# EAGLE board AVR-Pocket-Programmer_Panel_v11a (EAGLE 7.5.0), part 1 of 3
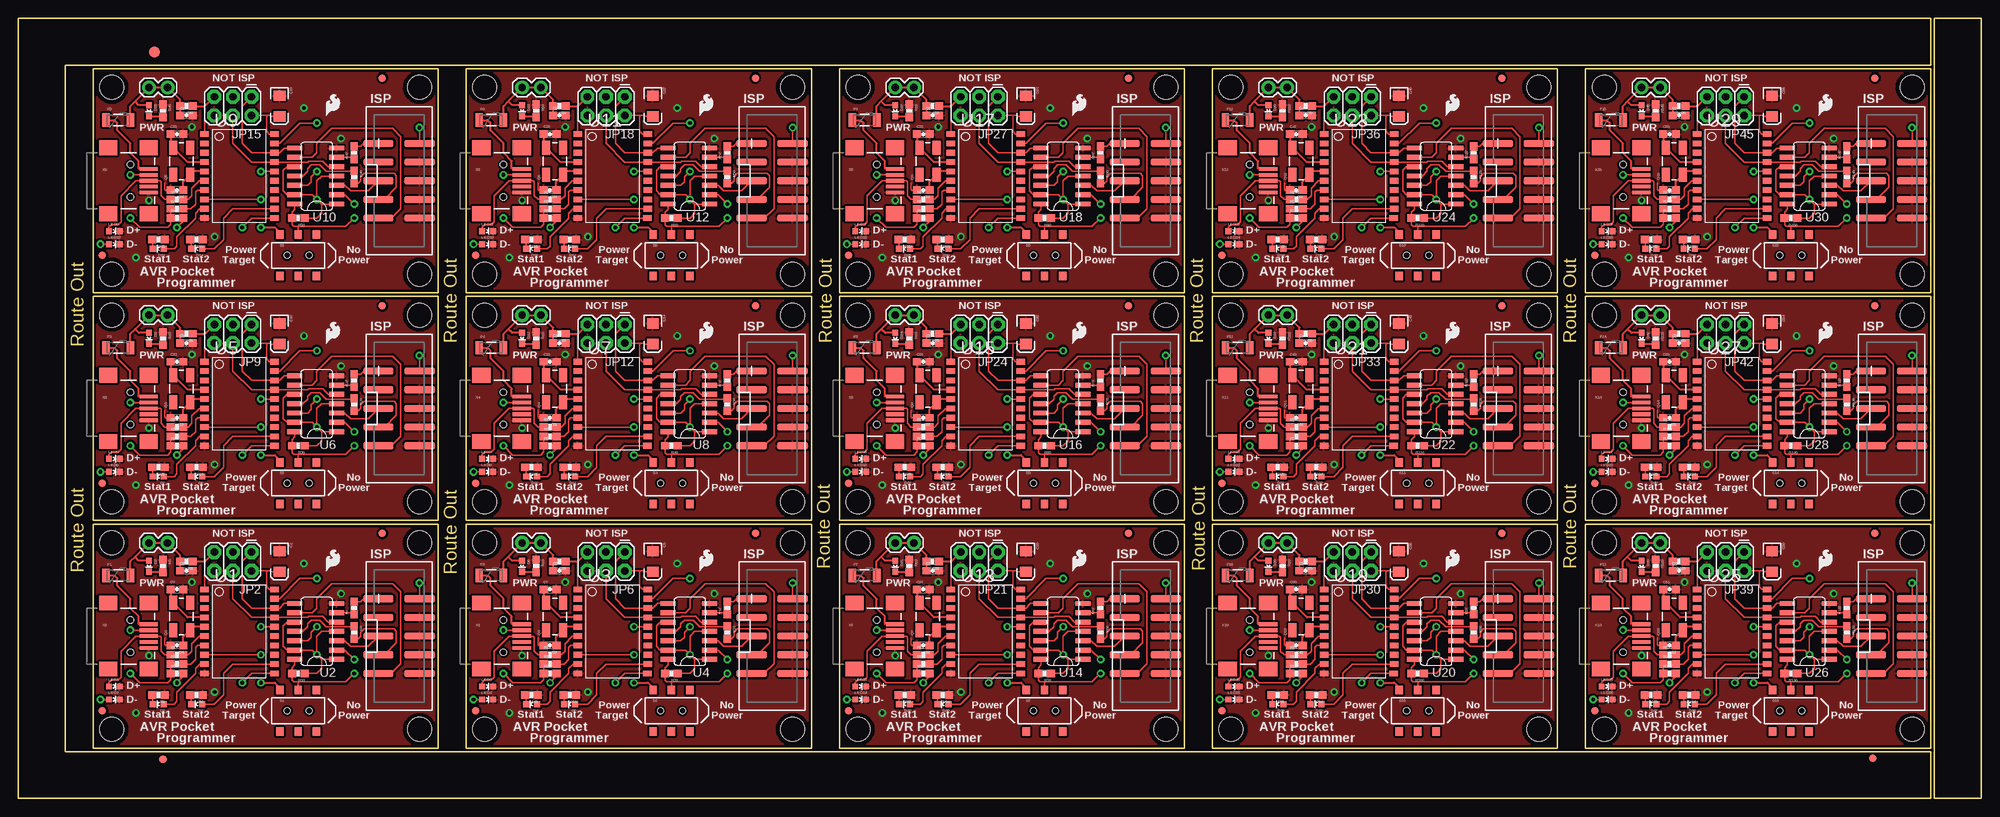
[diagram p0: board, top side]
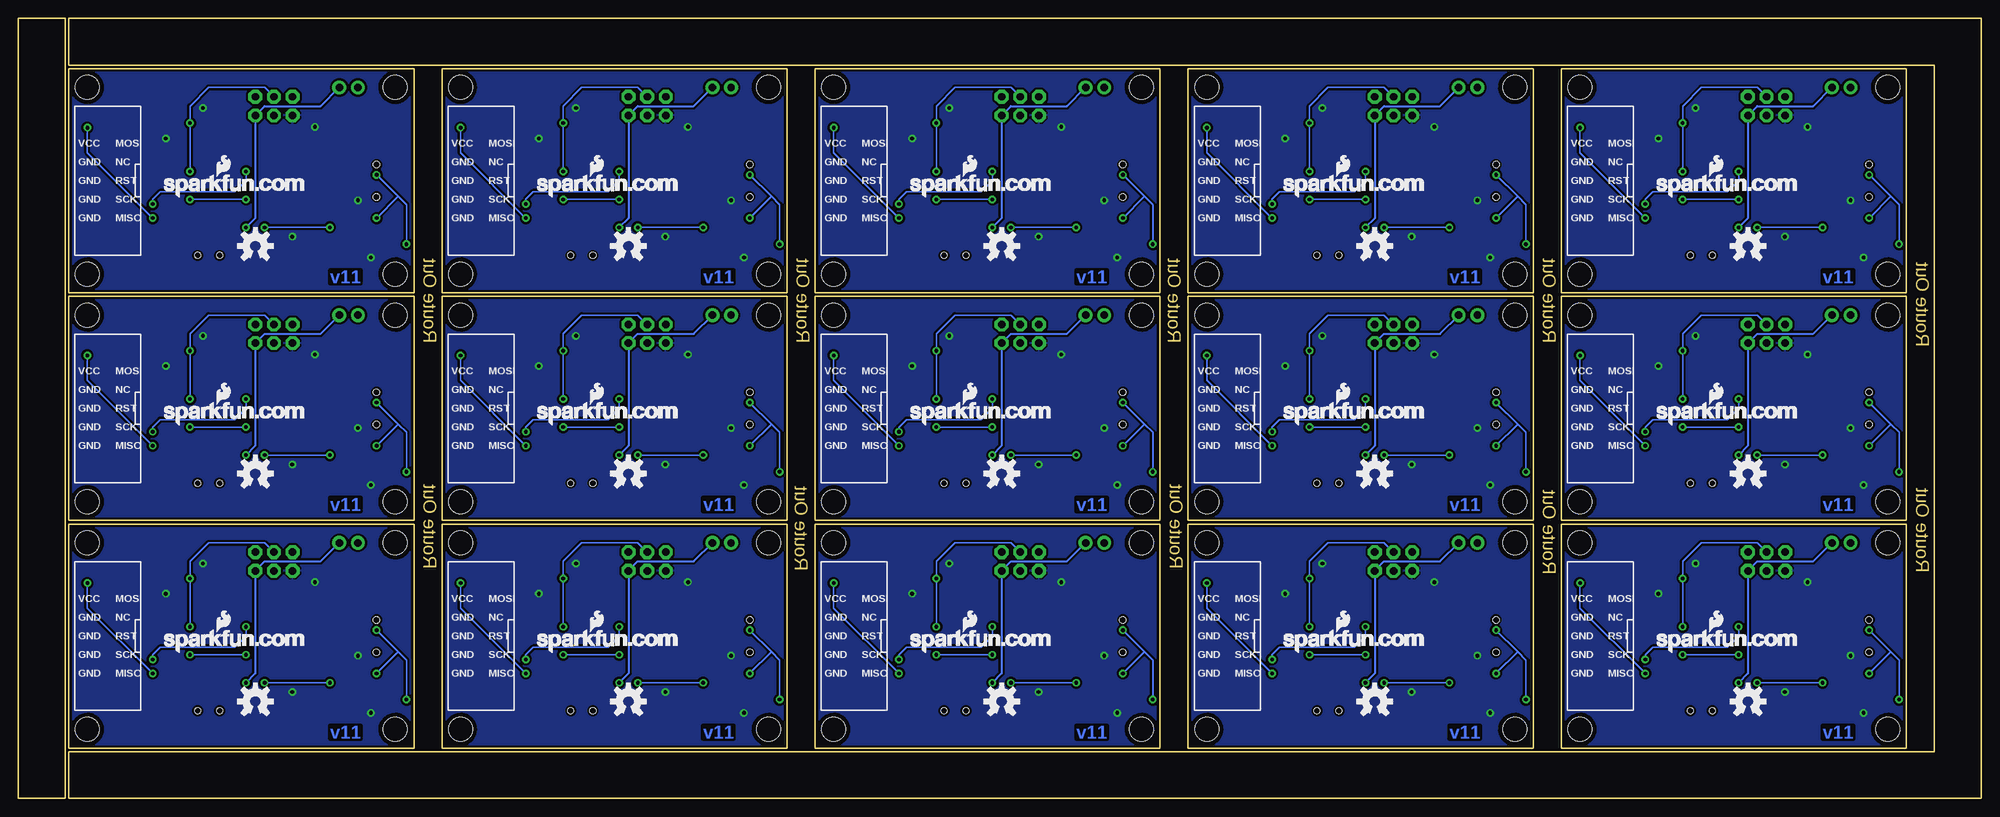
[diagram p1: board, bottom side, seen from below]

Size 267.21 x 106.17 mm. Coordinates in mm from the lower left corner, seen from the top.
Outline: 6.35,79.25 6.35,6.35 260.35,6.35 260.35,0 0,0 0,29.72
Outline: 0,27.18 0,106.17 6.35,106.17 187.96,106.17 190.5,106.17 260.35,106.17 260.35,99.82 6.35,99.82 6.35,76.71
Outline: 267.21,79.25 267.21,0 260.86,0 260.86,29.72
Outline: 260.86,27.18 260.86,106.17 267.21,106.17 267.21,76.71
Outline: 10.16,37.34 57.15,37.34 57.15,6.86 10.16,6.86 10.16,37.34
Outline: 60.96,37.34 107.95,37.34 107.95,6.86 60.96,6.86 60.96,37.34
Outline: 10.16,68.33 57.15,68.33 57.15,37.85 10.16,37.85 10.16,68.33
Outline: 60.96,68.33 107.95,68.33 107.95,37.85 60.96,37.85 60.96,68.33
Outline: 10.16,99.31 57.15,99.31 57.15,68.83 10.16,68.83 10.16,99.31
Outline: 60.96,99.31 107.95,99.31 107.95,68.83 60.96,68.83 60.96,99.31
Outline: 111.76,37.34 158.75,37.34 158.75,6.86 111.76,6.86 111.76,37.34
Outline: 111.76,68.33 158.75,68.33 158.75,37.85 111.76,37.85 111.76,68.33
Outline: 111.76,99.31 158.75,99.31 158.75,68.83 111.76,68.83 111.76,99.31
Outline: 162.56,37.34 209.55,37.34 209.55,6.86 162.56,6.86 162.56,37.34
Outline: 162.56,68.33 209.55,68.33 209.55,37.85 162.56,37.85 162.56,68.33
Outline: 162.56,99.31 209.55,99.31 209.55,68.83 162.56,68.83 162.56,99.31
Outline: 213.36,37.34 260.35,37.34 260.35,6.86 213.36,6.86 213.36,37.34
Outline: 213.36,68.33 260.35,68.33 260.35,37.85 213.36,37.85 213.36,68.33
Outline: 213.36,99.31 260.35,99.31 260.35,68.83 213.36,68.83 213.36,99.31
Copper layers (1*16): Top 0.035mm / dielectric 1.5mm / Bottom 0.035mm
Design rules "SparkFun": minimum track width 8mil, minimum drill 20mil, track to track 8mil, track to pad 8mil, pad to pad 8mil, via to via 8mil, smd to smd 8mil, copper to edge 10mil, drill to drill 8mil, minimum pad ring 12mil, minimum via ring 10mil, stop-mask expansion 4mil, vias tented up to drill 20mil, thermal gap 10mil
Net classes: 0 default: width 0.203 mm, drill 0.508 mm, clearance 0.203 mm

## Footprints (pad centres in the part's own frame; a part is rotated, then mirrored left to right if it is on the bottom)
EIA3216 = smd 1.4 x 1.6: A 1.4,0; C -1.4,0
0603-CAP = smd 1.1 x 1: 1 -0.85,0; 2 0.85,0
LED-0603 = smd 0.8 x 0.8: A 0,-0.75; C 0,0.75
FIDUCIAL-1.5X3 = smd 1.5 x 1.5: 1 0,0
FIDUCIAL-1X2 = smd 1 x 1: 1 0,0
PTC-1206-WIDE = smd 1 x 1.8: 1 -1.654,0; 2 1.654,0
1X02 = drill 1.016 pad 1.88: 1 0,0; 2 2.54,0
2X3 = drill 1.016 pad 1.88 octagon: 1 0,0; 2 0,2.54; 3 2.54,0; 4 2.54,2.54; 5 5.08,0; 6 5.08,2.54
2X5-SHROUDED_SMD = smd 4.15 x 1: 1 -2.794,5.08; 2 2.794,5.08; 3 -2.794,2.54; 4 2.794,2.54; 5 -2.794,0; 6 2.794,0; 7 -2.794,-2.54; 8 2.794,-2.54; 9 -2.794,-5.08; 10 2.794,-5.08
CRYSTAL-SMD-5X3 = smd 1.9 x 1.1: 1 -1.85,-1.15; 2 1.85,-1.15; 3 1.85,1.15; 4 -1.85,1.15
0603-RES = smd 1.1 x 1: 1 -0.85,0; 2 0.85,0
AYZ0202 = smd 1 x 1.15: 1 -2.5,2.825; 2 0,2.825; 3 2.5,2.825; 4 -2.5,-2.825; 5 0,-2.825; 6 2.5,-2.825 | hole 0.85: 1.5,0; -1.5,0
SO20L = smd 0.762 x 1.143: 1 -5.08,-5.131; 2 -3.81,-5.131; 3 -2.54,-5.131; 4 -1.27,-5.131; 5 0,-5.131; 6 1.27,-5.131; 7 2.54,-5.131; 8 3.81,-5.131; 9 5.08,-5.131; 10 6.35,-5.131; 11 6.35,4.369; 12 5.08,4.394; 13 3.81,4.394; 14 2.54,4.394; 15 1.27,4.394; 16 0,4.394; 17 -1.27,4.394; 18 -2.54,4.394; 19 -3.81,4.394; 20 -5.08,4.394
SO014 = smd 0.66 x 2.032: 1 -3.175,-2.68; 2 -1.905,-2.68; 3 -0.635,-2.68; 4 0.635,-2.68; 5 1.905,-2.68; 6 3.175,-2.68; 7 4.445,-2.68; 8 4.445,2.997; 9 3.175,2.997; 10 1.905,2.997; 11 0.635,2.997; 12 -0.635,2.997; 13 -1.905,2.997; 14 -3.175,2.997
STAND-OFF = hole 3.302: 0,0
USB-MINIB = smd 2.5 x 0.5: D+ 2.5,0; D- 2.5,0.8; GND 2.5,-1.6; ID 2.5,-0.8; VBUS 2.5,1.6 | smd 2.5 x 2: GND@1 -3,-4.5; GND@2 -3,4.5; GND@3 2.5,4.5; GND@4 2.5,-4.5 | hole 0.9: 0,2.2; 0,-2.2

## Placement (x,y rotation side)
C1  10uF  [EIA3216]  35.56,32.26 270 top
C2  0.1uF  [0603-CAP]  22.86,30.99 0 top
C3  22pF  [0603-CAP]  21.59,28.45 0 top
C4  22pF  [0603-CAP]  21.59,20.83 180 top
C5  0.1uF  [0603-CAP]  73.66,30.99 0 top
C6  10uF  [EIA3216]  86.36,32.26 270 top
C7  22pF  [0603-CAP]  72.39,28.45 0 top
C8  22pF  [0603-CAP]  72.39,20.83 180 top
C9  0.1uF  [0603-CAP]  22.86,61.98 0 top
C10  10uF  [EIA3216]  35.56,63.25 270 top
C11  22pF  [0603-CAP]  21.59,59.44 0 top
C12  22pF  [0603-CAP]  21.59,51.82 180 top
C13  0.1uF  [0603-CAP]  73.66,61.98 0 top
C14  10uF  [EIA3216]  86.36,63.25 270 top
C15  22pF  [0603-CAP]  72.39,59.44 0 top
C16  22pF  [0603-CAP]  72.39,51.82 180 top
C17  0.1uF  [0603-CAP]  22.86,92.96 0 top
C18  10uF  [EIA3216]  35.56,94.23 270 top
C19  22pF  [0603-CAP]  21.59,90.42 0 top
C20  22pF  [0603-CAP]  21.59,82.8 180 top
C21  0.1uF  [0603-CAP]  73.66,92.96 0 top
C22  10uF  [EIA3216]  86.36,94.23 270 top
C23  22pF  [0603-CAP]  72.39,90.42 0 top
C24  22pF  [0603-CAP]  72.39,82.8 180 top
C25  0.1uF  [0603-CAP]  124.46,30.99 0 top
C26  10uF  [EIA3216]  137.16,32.26 270 top
C27  22pF  [0603-CAP]  123.19,28.45 0 top
C28  22pF  [0603-CAP]  123.19,20.83 180 top
C29  0.1uF  [0603-CAP]  124.46,61.98 0 top
C30  10uF  [EIA3216]  137.16,63.25 270 top
C31  22pF  [0603-CAP]  123.19,59.44 0 top
C32  22pF  [0603-CAP]  123.19,51.82 180 top
C33  0.1uF  [0603-CAP]  124.46,92.96 0 top
C34  10uF  [EIA3216]  137.16,94.23 270 top
C35  22pF  [0603-CAP]  123.19,90.42 0 top
C36  22pF  [0603-CAP]  123.19,82.8 180 top
C37  0.1uF  [0603-CAP]  175.26,30.99 0 top
C38  10uF  [EIA3216]  187.96,32.26 270 top
C39  22pF  [0603-CAP]  173.99,28.45 0 top
C40  22pF  [0603-CAP]  173.99,20.83 180 top
C41  0.1uF  [0603-CAP]  175.26,61.98 0 top
C42  10uF  [EIA3216]  187.96,63.25 270 top
C43  22pF  [0603-CAP]  173.99,59.44 0 top
C44  22pF  [0603-CAP]  173.99,51.82 180 top
C45  0.1uF  [0603-CAP]  175.26,92.96 0 top
C46  10uF  [EIA3216]  187.96,94.23 270 top
C47  22pF  [0603-CAP]  173.99,90.42 0 top
C48  22pF  [0603-CAP]  173.99,82.8 180 top
C49  0.1uF  [0603-CAP]  226.06,30.99 0 top
C50  10uF  [EIA3216]  238.76,32.26 270 top
C51  22pF  [0603-CAP]  224.79,28.45 0 top
C52  22pF  [0603-CAP]  224.79,20.83 180 top
C53  0.1uF  [0603-CAP]  226.06,61.98 0 top
C54  10uF  [EIA3216]  238.76,63.25 270 top
C55  22pF  [0603-CAP]  224.79,59.44 0 top
C56  22pF  [0603-CAP]  224.79,51.82 180 top
C57  0.1uF  [0603-CAP]  226.06,92.96 0 top
C58  10uF  [EIA3216]  238.76,94.23 270 top
C59  22pF  [0603-CAP]  224.79,90.42 0 top
C60  22pF  [0603-CAP]  224.79,82.8 180 top
D1  Blue  [LED-0603]  24.26,12.83 90 top
D2  Red  [LED-0603]  19.05,12.83 90 top
D3  Blue  [LED-0603]  17.78,31.62 180 top
D4  Red  [LED-0603]  69.85,12.83 90 top
D5  Blue  [LED-0603]  75.06,12.83 90 top
D6  Blue  [LED-0603]  68.58,31.62 180 top
D7  Red  [LED-0603]  19.05,43.81 90 top
D8  Blue  [LED-0603]  24.26,43.81 90 top
D9  Blue  [LED-0603]  17.78,62.61 180 top
D10  Red  [LED-0603]  69.85,43.81 90 top
D11  Blue  [LED-0603]  75.06,43.81 90 top
D12  Blue  [LED-0603]  68.58,62.61 180 top
D13  Red  [LED-0603]  19.05,74.8 90 top
D14  Blue  [LED-0603]  24.26,74.8 90 top
D15  Blue  [LED-0603]  17.78,93.6 180 top
D16  Red  [LED-0603]  69.85,74.8 90 top
D17  Blue  [LED-0603]  75.06,74.8 90 top
D18  Blue  [LED-0603]  68.58,93.6 180 top
D19  Red  [LED-0603]  120.65,12.83 90 top
D20  Blue  [LED-0603]  125.86,12.83 90 top
D21  Blue  [LED-0603]  119.38,31.62 180 top
D22  Red  [LED-0603]  120.65,43.81 90 top
D23  Blue  [LED-0603]  125.86,43.81 90 top
D24  Blue  [LED-0603]  119.38,62.61 180 top
D25  Red  [LED-0603]  120.65,74.8 90 top
D26  Blue  [LED-0603]  125.86,74.8 90 top
D27  Blue  [LED-0603]  119.38,93.6 180 top
D28  Red  [LED-0603]  171.45,12.83 90 top
D29  Blue  [LED-0603]  176.66,12.83 90 top
D30  Blue  [LED-0603]  170.18,31.62 180 top
D31  Red  [LED-0603]  171.45,43.81 90 top
D32  Blue  [LED-0603]  176.66,43.81 90 top
D33  Blue  [LED-0603]  170.18,62.61 180 top
D34  Red  [LED-0603]  171.45,74.8 90 top
D35  Blue  [LED-0603]  176.66,74.8 90 top
D36  Blue  [LED-0603]  170.18,93.6 180 top
D37  Red  [LED-0603]  222.25,12.83 90 top
D38  Blue  [LED-0603]  227.46,12.83 90 top
D39  Blue  [LED-0603]  220.98,31.62 180 top
D40  Red  [LED-0603]  222.25,43.81 90 top
D41  Blue  [LED-0603]  227.46,43.81 90 top
D42  Blue  [LED-0603]  220.98,62.61 180 top
D43  Red  [LED-0603]  222.25,74.8 90 top
D44  Blue  [LED-0603]  227.46,74.8 90 top
D45  Blue  [LED-0603]  220.98,93.6 180 top
E$1  [FIDUCIAL-1.5X3]  18.54,101.6 0 top
E$2  [FIDUCIAL-1X2]  19.68,5.33 180 top
E$7  [FIDUCIAL-1X2]  252.48,5.46 90 top
F1  500mA  [PTC-1206-WIDE]  13.59,30.35 0 top
F2  500mA  [PTC-1206-WIDE]  64.39,30.35 0 top
F3  500mA  [PTC-1206-WIDE]  13.59,61.34 0 top
F4  500mA  [PTC-1206-WIDE]  64.39,61.34 0 top
F5  500mA  [PTC-1206-WIDE]  13.59,92.33 0 top
F6  500mA  [PTC-1206-WIDE]  64.39,92.33 0 top
F7  500mA  [PTC-1206-WIDE]  115.19,30.35 0 top
F8  500mA  [PTC-1206-WIDE]  115.19,61.34 0 top
F9  500mA  [PTC-1206-WIDE]  115.19,92.33 0 top
F10  500mA  [PTC-1206-WIDE]  165.99,30.35 0 top
F11  500mA  [PTC-1206-WIDE]  165.99,61.34 0 top
F12  500mA  [PTC-1206-WIDE]  165.99,92.33 0 top
F13  500mA  [PTC-1206-WIDE]  216.79,30.35 0 top
F14  500mA  [PTC-1206-WIDE]  216.79,61.34 0 top
F15  500mA  [PTC-1206-WIDE]  216.79,92.33 0 top
JP1  Power Select  [1X02]  17.78,34.8 0 top
JP2  AVR_SPI_PRG_6PTH  [2X3]  31.75,33.53 180 top
JP3  AVR_SPI_PROG2SHROUDED_SMD  [2X5-SHROUDED_SMD]  51.82,22.1 0 top
JP4  Power Select  [1X02]  68.58,34.8 0 top
JP5  AVR_SPI_PROG2SHROUDED_SMD  [2X5-SHROUDED_SMD]  102.62,22.1 0 top
JP6  AVR_SPI_PRG_6PTH  [2X3]  82.55,33.53 180 top
JP7  Power Select  [1X02]  17.78,65.79 0 top
JP8  AVR_SPI_PROG2SHROUDED_SMD  [2X5-SHROUDED_SMD]  51.82,53.09 0 top
JP9  AVR_SPI_PRG_6PTH  [2X3]  31.75,64.52 180 top
JP10  Power Select  [1X02]  68.58,65.79 0 top
JP11  AVR_SPI_PROG2SHROUDED_SMD  [2X5-SHROUDED_SMD]  102.62,53.09 0 top
JP12  AVR_SPI_PRG_6PTH  [2X3]  82.55,64.52 180 top
JP13  Power Select  [1X02]  17.78,96.77 0 top
JP14  AVR_SPI_PROG2SHROUDED_SMD  [2X5-SHROUDED_SMD]  51.82,84.07 0 top
JP15  AVR_SPI_PRG_6PTH  [2X3]  31.75,95.5 180 top
JP16  Power Select  [1X02]  68.58,96.77 0 top
JP17  AVR_SPI_PROG2SHROUDED_SMD  [2X5-SHROUDED_SMD]  102.62,84.07 0 top
JP18  AVR_SPI_PRG_6PTH  [2X3]  82.55,95.5 180 top
JP19  Power Select  [1X02]  119.38,34.8 0 top
JP20  AVR_SPI_PROG2SHROUDED_SMD  [2X5-SHROUDED_SMD]  153.42,22.1 0 top
JP21  AVR_SPI_PRG_6PTH  [2X3]  133.35,33.53 180 top
JP22  Power Select  [1X02]  119.38,65.79 0 top
JP23  AVR_SPI_PROG2SHROUDED_SMD  [2X5-SHROUDED_SMD]  153.42,53.09 0 top
JP24  AVR_SPI_PRG_6PTH  [2X3]  133.35,64.52 180 top
JP25  Power Select  [1X02]  119.38,96.77 0 top
JP26  AVR_SPI_PROG2SHROUDED_SMD  [2X5-SHROUDED_SMD]  153.42,84.07 0 top
JP27  AVR_SPI_PRG_6PTH  [2X3]  133.35,95.5 180 top
JP28  Power Select  [1X02]  170.18,34.8 0 top
JP29  AVR_SPI_PROG2SHROUDED_SMD  [2X5-SHROUDED_SMD]  204.22,22.1 0 top
JP30  AVR_SPI_PRG_6PTH  [2X3]  184.15,33.53 180 top
JP31  Power Select  [1X02]  170.18,65.79 0 top
JP32  AVR_SPI_PROG2SHROUDED_SMD  [2X5-SHROUDED_SMD]  204.22,53.09 0 top
JP33  AVR_SPI_PRG_6PTH  [2X3]  184.15,64.52 180 top
JP34  Power Select  [1X02]  170.18,96.77 0 top
JP35  AVR_SPI_PROG2SHROUDED_SMD  [2X5-SHROUDED_SMD]  204.22,84.07 0 top
JP36  AVR_SPI_PRG_6PTH  [2X3]  184.15,95.5 180 top
JP37  Power Select  [1X02]  220.98,34.8 0 top
JP38  AVR_SPI_PROG2SHROUDED_SMD  [2X5-SHROUDED_SMD]  255.02,22.1 0 top
JP39  AVR_SPI_PRG_6PTH  [2X3]  234.95,33.53 180 top
JP40  Power Select  [1X02]  220.98,65.79 0 top
JP41  AVR_SPI_PROG2SHROUDED_SMD  [2X5-SHROUDED_SMD]  255.02,53.09 0 top
JP42  AVR_SPI_PRG_6PTH  [2X3]  234.95,64.52 180 top
JP43  Power Select  [1X02]  220.98,96.77 0 top
JP44  AVR_SPI_PROG2SHROUDED_SMD  [2X5-SHROUDED_SMD]  255.02,84.07 0 top
JP45  AVR_SPI_PRG_6PTH  [2X3]  234.95,95.5 180 top
LED1  Blue  [LED-0603]  13.08,15.24 270 top
LED2  Blue  [LED-0603]  13.08,13.46 270 top
LED3  Blue  [LED-0603]  63.88,15.24 270 top
LED4  Blue  [LED-0603]  63.88,13.46 270 top
LED5  Blue  [LED-0603]  13.08,46.23 270 top
LED6  Blue  [LED-0603]  13.08,44.45 270 top
LED7  Blue  [LED-0603]  63.88,46.23 270 top
LED8  Blue  [LED-0603]  63.88,44.45 270 top
LED9  Blue  [LED-0603]  13.08,77.22 270 top
LED10  Blue  [LED-0603]  13.08,75.44 270 top
LED11  Blue  [LED-0603]  63.88,77.22 270 top
LED12  Blue  [LED-0603]  63.88,75.44 270 top
LED13  Blue  [LED-0603]  114.68,15.24 270 top
LED14  Blue  [LED-0603]  114.68,13.46 270 top
LED15  Blue  [LED-0603]  114.68,46.23 270 top
LED16  Blue  [LED-0603]  114.68,44.45 270 top
LED17  Blue  [LED-0603]  114.68,77.22 270 top
LED18  Blue  [LED-0603]  114.68,75.44 270 top
LED19  Blue  [LED-0603]  165.48,15.24 270 top
LED20  Blue  [LED-0603]  165.48,13.46 270 top
LED21  Blue  [LED-0603]  165.48,46.23 270 top
LED22  Blue  [LED-0603]  165.48,44.45 270 top
LED23  Blue  [LED-0603]  165.48,77.22 270 top
LED24  Blue  [LED-0603]  165.48,75.44 270 top
LED25  Blue  [LED-0603]  216.28,15.24 270 top
LED26  Blue  [LED-0603]  216.28,13.46 270 top
LED27  Blue  [LED-0603]  216.28,46.23 270 top
LED28  Blue  [LED-0603]  216.28,44.45 270 top
LED29  Blue  [LED-0603]  216.28,77.22 270 top
LED30  Blue  [LED-0603]  216.28,75.44 270 top
LOGO1  OSHW-LOGOM  [OSHW-LOGO-M]  31.75,13.21 0 bottom
LOGO2  OSHW-LOGOM  [OSHW-LOGO-M]  82.55,13.21 0 bottom
LOGO3  OSHW-LOGOM  [OSHW-LOGO-M]  31.75,44.2 0 bottom
LOGO4  OSHW-LOGOM  [OSHW-LOGO-M]  82.55,44.2 0 bottom
LOGO5  OSHW-LOGOM  [OSHW-LOGO-M]  31.75,75.18 0 bottom
LOGO6  OSHW-LOGOM  [OSHW-LOGO-M]  82.55,75.18 0 bottom
LOGO7  OSHW-LOGOM  [OSHW-LOGO-M]  133.35,13.21 0 bottom
LOGO8  OSHW-LOGOM  [OSHW-LOGO-M]  133.35,44.2 0 bottom
LOGO9  OSHW-LOGOM  [OSHW-LOGO-M]  133.35,75.18 0 bottom
LOGO10  OSHW-LOGOM  [OSHW-LOGO-M]  184.15,13.21 0 bottom
LOGO11  OSHW-LOGOM  [OSHW-LOGO-M]  184.15,44.2 0 bottom
LOGO12  OSHW-LOGOM  [OSHW-LOGO-M]  184.15,75.18 0 bottom
LOGO13  OSHW-LOGOM  [OSHW-LOGO-M]  234.95,13.21 0 bottom
LOGO14  OSHW-LOGOM  [OSHW-LOGO-M]  234.95,44.2 0 bottom
LOGO15  OSHW-LOGOM  [OSHW-LOGO-M]  234.95,75.18 0 bottom
Q1  12 MHz  [CRYSTAL-SMD-5X3]  22.23,24.77 90 top
Q2  12 MHz  [CRYSTAL-SMD-5X3]  73.03,24.77 90 top
Q3  12 MHz  [CRYSTAL-SMD-5X3]  22.23,55.75 90 top
Q4  12 MHz  [CRYSTAL-SMD-5X3]  73.03,55.75 90 top
Q5  12 MHz  [CRYSTAL-SMD-5X3]  22.23,86.74 90 top
Q6  12 MHz  [CRYSTAL-SMD-5X3]  73.03,86.74 90 top
Q7  12 MHz  [CRYSTAL-SMD-5X3]  123.83,24.77 90 top
Q8  12 MHz  [CRYSTAL-SMD-5X3]  123.83,55.75 90 top
Q9  12 MHz  [CRYSTAL-SMD-5X3]  123.83,86.74 90 top
Q10  12 MHz  [CRYSTAL-SMD-5X3]  174.62,24.77 90 top
Q11  12 MHz  [CRYSTAL-SMD-5X3]  174.62,55.75 90 top
Q12  12 MHz  [CRYSTAL-SMD-5X3]  174.62,86.74 90 top
Q13  12 MHz  [CRYSTAL-SMD-5X3]  225.43,24.77 90 top
Q14  12 MHz  [CRYSTAL-SMD-5X3]  225.43,55.75 90 top
Q15  12 MHz  [CRYSTAL-SMD-5X3]  225.43,86.74 90 top
R1  27  [0603-RES]  21.59,19.56 0 top
R2  27  [0603-RES]  21.59,18.29 0 top
R3  1.5K  [0603-RES]  21.59,17.02 0 top
R4  1K  [0603-RES]  24.26,14.1 180 top
R5  1K  [0603-RES]  19.05,14.1 180 top
R6  1K  [0603-RES]  22.86,32.26 180 top
R7  100  [0603-RES]  45.72,25.91 90 top
R8  100  [0603-RES]  45.72,22.61 270 top
R9  1K  [0603-RES]  19.68,31.62 270 top
R10  22K  [0603-RES]  38.1,17.02 180 top
R11  27  [0603-RES]  72.39,19.56 0 top
R12  27  [0603-RES]  72.39,18.29 0 top
R13  1.5K  [0603-RES]  72.39,17.02 0 top
R14  1K  [0603-RES]  75.06,14.1 180 top
R15  1K  [0603-RES]  69.85,14.1 180 top
R16  1K  [0603-RES]  73.66,32.26 180 top
R17  100  [0603-RES]  96.52,25.91 90 top
R18  100  [0603-RES]  96.52,22.61 270 top
R19  1K  [0603-RES]  70.48,31.62 270 top
R20  22K  [0603-RES]  88.9,17.02 180 top
R21  27  [0603-RES]  21.59,50.55 0 top
R22  27  [0603-RES]  21.59,49.28 0 top
R23  1.5K  [0603-RES]  21.59,48.01 0 top
R24  1K  [0603-RES]  24.26,45.09 180 top
R25  1K  [0603-RES]  19.05,45.09 180 top
R26  1K  [0603-RES]  22.86,63.25 180 top
R27  100  [0603-RES]  45.72,56.9 90 top
R28  100  [0603-RES]  45.72,53.59 270 top
R29  1K  [0603-RES]  19.68,62.61 270 top
R30  22K  [0603-RES]  38.1,48.01 180 top
R31  27  [0603-RES]  72.39,50.55 0 top
R32  27  [0603-RES]  72.39,49.28 0 top
R33  1.5K  [0603-RES]  72.39,48.01 0 top
R34  1K  [0603-RES]  75.06,45.09 180 top
R35  1K  [0603-RES]  69.85,45.09 180 top
R36  1K  [0603-RES]  73.66,63.25 180 top
R37  100  [0603-RES]  96.52,56.9 90 top
R38  100  [0603-RES]  96.52,53.59 270 top
R39  1K  [0603-RES]  70.48,62.61 270 top
R40  22K  [0603-RES]  88.9,48.01 180 top
R41  27  [0603-RES]  21.59,81.53 0 top
R42  27  [0603-RES]  21.59,80.26 0 top
R43  1.5K  [0603-RES]  21.59,78.99 0 top
R44  1K  [0603-RES]  24.26,76.07 180 top
R45  1K  [0603-RES]  19.05,76.07 180 top
R46  1K  [0603-RES]  22.86,94.23 180 top
R47  100  [0603-RES]  45.72,87.88 90 top
R48  100  [0603-RES]  45.72,84.58 270 top
R49  1K  [0603-RES]  19.68,93.6 270 top
R50  22K  [0603-RES]  38.1,78.99 180 top
R51  27  [0603-RES]  72.39,81.53 0 top
R52  27  [0603-RES]  72.39,80.26 0 top
R53  1.5K  [0603-RES]  72.39,78.99 0 top
R54  1K  [0603-RES]  75.06,76.07 180 top
R55  1K  [0603-RES]  69.85,76.07 180 top
R56  1K  [0603-RES]  73.66,94.23 180 top
R57  100  [0603-RES]  96.52,87.88 90 top
R58  100  [0603-RES]  96.52,84.58 270 top
R59  1K  [0603-RES]  70.48,93.6 270 top
R60  22K  [0603-RES]  88.9,78.99 180 top
R61  27  [0603-RES]  123.19,19.56 0 top
R62  27  [0603-RES]  123.19,18.29 0 top
R63  1.5K  [0603-RES]  123.19,17.02 0 top
R64  1K  [0603-RES]  125.86,14.1 180 top
R65  1K  [0603-RES]  120.65,14.1 180 top
R66  1K  [0603-RES]  124.46,32.26 180 top
R67  100  [0603-RES]  147.32,25.91 90 top
R68  100  [0603-RES]  147.32,22.61 270 top
R69  1K  [0603-RES]  121.28,31.62 270 top
R70  22K  [0603-RES]  139.7,17.02 180 top
R71  27  [0603-RES]  123.19,50.55 0 top
R72  27  [0603-RES]  123.19,49.28 0 top
R73  1.5K  [0603-RES]  123.19,48.01 0 top
R74  1K  [0603-RES]  125.86,45.09 180 top
R75  1K  [0603-RES]  120.65,45.09 180 top
R76  1K  [0603-RES]  124.46,63.25 180 top
R77  100  [0603-RES]  147.32,56.9 90 top
R78  100  [0603-RES]  147.32,53.59 270 top
R79  1K  [0603-RES]  121.28,62.61 270 top
R80  22K  [0603-RES]  139.7,48.01 180 top
R81  27  [0603-RES]  123.19,81.53 0 top
R82  27  [0603-RES]  123.19,80.26 0 top
R83  1.5K  [0603-RES]  123.19,78.99 0 top
R84  1K  [0603-RES]  125.86,76.07 180 top
R85  1K  [0603-RES]  120.65,76.07 180 top
R86  1K  [0603-RES]  124.46,94.23 180 top
R87  100  [0603-RES]  147.32,87.88 90 top
R88  100  [0603-RES]  147.32,84.58 270 top
R89  1K  [0603-RES]  121.28,93.6 270 top
R90  22K  [0603-RES]  139.7,78.99 180 top
R91  27  [0603-RES]  173.99,19.56 0 top
R92  27  [0603-RES]  173.99,18.29 0 top
R93  1.5K  [0603-RES]  173.99,17.02 0 top
R94  1K  [0603-RES]  176.66,14.1 180 top
R95  1K  [0603-RES]  171.45,14.1 180 top
R96  1K  [0603-RES]  175.26,32.26 180 top
R97  100  [0603-RES]  198.12,25.91 90 top
R98  100  [0603-RES]  198.12,22.61 270 top
R99  1K  [0603-RES]  172.09,31.62 270 top
R100  22K  [0603-RES]  190.5,17.02 180 top
R101  27  [0603-RES]  173.99,50.55 0 top
R102  27  [0603-RES]  173.99,49.28 0 top
R103  1.5K  [0603-RES]  173.99,48.01 0 top
R104  1K  [0603-RES]  176.66,45.09 180 top
R105  1K  [0603-RES]  171.45,45.09 180 top
R106  1K  [0603-RES]  175.26,63.25 180 top
R107  100  [0603-RES]  198.12,56.9 90 top
R108  100  [0603-RES]  198.12,53.59 270 top
R109  1K  [0603-RES]  172.09,62.61 270 top
R110  22K  [0603-RES]  190.5,48.01 180 top
R111  27  [0603-RES]  173.99,81.53 0 top
R112  27  [0603-RES]  173.99,80.26 0 top
R113  1.5K  [0603-RES]  173.99,78.99 0 top
R114  1K  [0603-RES]  176.66,76.07 180 top
R115  1K  [0603-RES]  171.45,76.07 180 top
R116  1K  [0603-RES]  175.26,94.23 180 top
R117  100  [0603-RES]  198.12,87.88 90 top
R118  100  [0603-RES]  198.12,84.58 270 top
R119  1K  [0603-RES]  172.09,93.6 270 top
R120  22K  [0603-RES]  190.5,78.99 180 top
R121  27  [0603-RES]  224.79,19.56 0 top
R122  27  [0603-RES]  224.79,18.29 0 top
R123  1.5K  [0603-RES]  224.79,17.02 0 top
R124  1K  [0603-RES]  227.46,14.1 180 top
R125  1K  [0603-RES]  222.25,14.1 180 top
R126  1K  [0603-RES]  226.06,32.26 180 top
R127  100  [0603-RES]  248.92,25.91 90 top
R128  100  [0603-RES]  248.92,22.61 270 top
R129  1K  [0603-RES]  222.88,31.62 270 top
R130  22K  [0603-RES]  241.3,17.02 180 top
R131  27  [0603-RES]  224.79,50.55 0 top
R132  27  [0603-RES]  224.79,49.28 0 top
R133  1.5K  [0603-RES]  224.79,48.01 0 top
R134  1K  [0603-RES]  227.46,45.09 180 top
R135  1K  [0603-RES]  222.25,45.09 180 top
R136  1K  [0603-RES]  226.06,63.25 180 top
R137  100  [0603-RES]  248.92,56.9 90 top
R138  100  [0603-RES]  248.92,53.59 270 top
R139  1K  [0603-RES]  222.88,62.61 270 top
R140  22K  [0603-RES]  241.3,48.01 180 top
R141  27  [0603-RES]  224.79,81.53 0 top
R142  27  [0603-RES]  224.79,80.26 0 top
R143  1.5K  [0603-RES]  224.79,78.99 0 top
R144  1K  [0603-RES]  227.46,76.07 180 top
R145  1K  [0603-RES]  222.25,76.07 180 top
R146  1K  [0603-RES]  226.06,94.23 180 top
R147  100  [0603-RES]  248.92,87.88 90 top
R148  100  [0603-RES]  248.92,84.58 270 top
R149  1K  [0603-RES]  222.88,93.6 270 top
R150  22K  [0603-RES]  241.3,78.99 180 top
S1  Power Select  [AYZ0202]  38.1,11.94 0 top
S2  Power Select  [AYZ0202]  88.9,11.94 0 top
S3  Power Select  [AYZ0202]  38.1,42.93 0 top
S4  Power Select  [AYZ0202]  88.9,42.93 0 top
S5  Power Select  [AYZ0202]  38.1,73.91 0 top
S6  Power Select  [AYZ0202]  88.9,73.91 0 top
S7  Power Select  [AYZ0202]  139.7,11.94 0 top
S8  Power Select  [AYZ0202]  139.7,42.93 0 top
S9  Power Select  [AYZ0202]  139.7,73.91 0 top
S10  Power Select  [AYZ0202]  190.5,11.94 0 top
S11  Power Select  [AYZ0202]  190.5,42.93 0 top
S12  Power Select  [AYZ0202]  190.5,73.91 0 top
S13  Power Select  [AYZ0202]  241.3,11.94 0 top
S14  Power Select  [AYZ0202]  241.3,42.93 0 top
S15  Power Select  [AYZ0202]  241.3,73.91 0 top
U1  ATTINY2313-20S  [SO20L]  30.48,23.37 270 top
U2  74ACT125D  [SO014]  40.64,22.1 90 top
U3  ATTINY2313-20S  [SO20L]  81.28,23.37 270 top
U4  74ACT125D  [SO014]  91.44,22.1 90 top
U5  ATTINY2313-20S  [SO20L]  30.48,54.36 270 top
U6  74ACT125D  [SO014]  40.64,53.09 90 top
U7  ATTINY2313-20S  [SO20L]  81.28,54.36 270 top
U8  74ACT125D  [SO014]  91.44,53.09 90 top
U9  ATTINY2313-20S  [SO20L]  30.48,85.34 270 top
U10  74ACT125D  [SO014]  40.64,84.07 90 top
U11  ATTINY2313-20S  [SO20L]  81.28,85.34 270 top
U12  74ACT125D  [SO014]  91.44,84.07 90 top
U13  ATTINY2313-20S  [SO20L]  132.08,23.37 270 top
U14  74ACT125D  [SO014]  142.24,22.1 90 top
U15  ATTINY2313-20S  [SO20L]  132.08,54.36 270 top
U16  74ACT125D  [SO014]  142.24,53.09 90 top
U17  ATTINY2313-20S  [SO20L]  132.08,85.34 270 top
U18  74ACT125D  [SO014]  142.24,84.07 90 top
U19  ATTINY2313-20S  [SO20L]  182.88,23.37 270 top
U20  74ACT125D  [SO014]  193.04,22.1 90 top
U21  ATTINY2313-20S  [SO20L]  182.88,54.36 270 top
U22  74ACT125D  [SO014]  193.04,53.09 90 top
U23  ATTINY2313-20S  [SO20L]  182.88,85.34 270 top
U24  74ACT125D  [SO014]  193.04,84.07 90 top
U25  ATTINY2313-20S  [SO20L]  233.68,23.37 270 top
U26  74ACT125D  [SO014]  243.84,22.1 90 top
U27  ATTINY2313-20S  [SO20L]  233.68,54.36 270 top
U28  74ACT125D  [SO014]  243.84,53.09 90 top
U29  ATTINY2313-20S  [SO20L]  233.68,85.34 270 top
U30  74ACT125D  [SO014]  243.84,84.07 90 top
U$1  STAND-OFF  [STAND-OFF]  12.7,9.4 0 top
U$2  LOGO-SFESK  [SFE-LOGO-FLAME]  41.91,30.99 0 top
U$3  STAND-OFF  [STAND-OFF]  12.7,34.8 0 top
U$4  STAND-OFF  [STAND-OFF]  54.61,34.8 0 top
U$5  STAND-OFF  [STAND-OFF]  54.61,9.4 0 top
U$6  FIDUCIAL1X2  [FIDUCIAL-1X2]  11.43,11.94 0 top
U$7  FIDUCIAL1X2  [FIDUCIAL-1X2]  49.53,36.07 0 top
U$8  LOGO-SFENEW  [SFE-NEW-WEBLOGO]  44.2,19.81 0 bottom
U$9  STAND-OFF  [STAND-OFF]  63.5,9.4 0 top
U$10  STAND-OFF  [STAND-OFF]  63.5,34.8 0 top
U$11  STAND-OFF  [STAND-OFF]  105.41,34.8 0 top
U$12  STAND-OFF  [STAND-OFF]  105.41,9.4 0 top
U$13  FIDUCIAL1X2  [FIDUCIAL-1X2]  62.23,11.94 0 top
U$14  FIDUCIAL1X2  [FIDUCIAL-1X2]  100.33,36.07 0 top
U$15  LOGO-SFENEW  [SFE-NEW-WEBLOGO]  95,19.81 0 bottom
U$16  LOGO-SFESK  [SFE-LOGO-FLAME]  92.71,30.99 0 top
U$17  STAND-OFF  [STAND-OFF]  12.7,40.39 0 top
U$18  STAND-OFF  [STAND-OFF]  12.7,65.79 0 top
U$19  STAND-OFF  [STAND-OFF]  54.61,65.79 0 top
U$20  STAND-OFF  [STAND-OFF]  54.61,40.39 0 top
U$21  FIDUCIAL1X2  [FIDUCIAL-1X2]  11.43,42.93 0 top
U$22  FIDUCIAL1X2  [FIDUCIAL-1X2]  49.53,67.06 0 top
U$23  LOGO-SFENEW  [SFE-NEW-WEBLOGO]  44.2,50.8 0 bottom
U$24  LOGO-SFESK  [SFE-LOGO-FLAME]  41.91,61.98 0 top
U$25  STAND-OFF  [STAND-OFF]  63.5,40.39 0 top
U$26  STAND-OFF  [STAND-OFF]  63.5,65.79 0 top
U$27  STAND-OFF  [STAND-OFF]  105.41,65.79 0 top
U$28  STAND-OFF  [STAND-OFF]  105.41,40.39 0 top
U$29  FIDUCIAL1X2  [FIDUCIAL-1X2]  62.23,42.93 0 top
U$30  FIDUCIAL1X2  [FIDUCIAL-1X2]  100.33,67.06 0 top
U$31  LOGO-SFENEW  [SFE-NEW-WEBLOGO]  95,50.8 0 bottom
U$32  LOGO-SFESK  [SFE-LOGO-FLAME]  92.71,61.98 0 top
U$33  STAND-OFF  [STAND-OFF]  12.7,71.37 0 top
U$34  STAND-OFF  [STAND-OFF]  12.7,96.77 0 top
U$35  STAND-OFF  [STAND-OFF]  54.61,96.77 0 top
U$36  STAND-OFF  [STAND-OFF]  54.61,71.37 0 top
U$37  FIDUCIAL1X2  [FIDUCIAL-1X2]  11.43,73.91 0 top
U$38  FIDUCIAL1X2  [FIDUCIAL-1X2]  49.53,98.04 0 top
U$39  LOGO-SFENEW  [SFE-NEW-WEBLOGO]  44.2,81.79 0 bottom
U$40  LOGO-SFESK  [SFE-LOGO-FLAME]  41.91,92.96 0 top
U$41  STAND-OFF  [STAND-OFF]  63.5,71.37 0 top
U$42  STAND-OFF  [STAND-OFF]  63.5,96.77 0 top
U$43  STAND-OFF  [STAND-OFF]  105.41,96.77 0 top
U$44  STAND-OFF  [STAND-OFF]  105.41,71.37 0 top
U$45  FIDUCIAL1X2  [FIDUCIAL-1X2]  62.23,73.91 0 top
U$46  FIDUCIAL1X2  [FIDUCIAL-1X2]  100.33,98.04 0 top
U$47  LOGO-SFENEW  [SFE-NEW-WEBLOGO]  95,81.79 0 bottom
U$48  LOGO-SFESK  [SFE-LOGO-FLAME]  92.71,92.96 0 top
U$49  STAND-OFF  [STAND-OFF]  114.3,9.4 0 top
U$50  STAND-OFF  [STAND-OFF]  114.3,34.8 0 top
U$51  STAND-OFF  [STAND-OFF]  156.21,34.8 0 top
U$52  STAND-OFF  [STAND-OFF]  156.21,9.4 0 top
U$53  FIDUCIAL1X2  [FIDUCIAL-1X2]  113.03,11.94 0 top
U$54  FIDUCIAL1X2  [FIDUCIAL-1X2]  151.13,36.07 0 top
U$55  LOGO-SFENEW  [SFE-NEW-WEBLOGO]  145.8,19.81 0 bottom
U$56  LOGO-SFESK  [SFE-LOGO-FLAME]  143.51,30.99 0 top
U$57  STAND-OFF  [STAND-OFF]  114.3,40.39 0 top
U$58  STAND-OFF  [STAND-OFF]  114.3,65.79 0 top
U$59  STAND-OFF  [STAND-OFF]  156.21,65.79 0 top
U$60  STAND-OFF  [STAND-OFF]  156.21,40.39 0 top
U$61  FIDUCIAL1X2  [FIDUCIAL-1X2]  113.03,42.93 0 top
U$62  FIDUCIAL1X2  [FIDUCIAL-1X2]  151.13,67.06 0 top
U$63  LOGO-SFENEW  [SFE-NEW-WEBLOGO]  145.8,50.8 0 bottom
U$64  LOGO-SFESK  [SFE-LOGO-FLAME]  143.51,61.98 0 top
U$65  STAND-OFF  [STAND-OFF]  114.3,71.37 0 top
U$66  STAND-OFF  [STAND-OFF]  114.3,96.77 0 top
U$67  STAND-OFF  [STAND-OFF]  156.21,96.77 0 top
U$68  STAND-OFF  [STAND-OFF]  156.21,71.37 0 top
U$69  FIDUCIAL1X2  [FIDUCIAL-1X2]  113.03,73.91 0 top
U$70  FIDUCIAL1X2  [FIDUCIAL-1X2]  151.13,98.04 0 top
U$71  LOGO-SFENEW  [SFE-NEW-WEBLOGO]  145.8,81.79 0 bottom
U$72  LOGO-SFESK  [SFE-LOGO-FLAME]  143.51,92.96 0 top
U$73  STAND-OFF  [STAND-OFF]  165.1,9.4 0 top
U$74  STAND-OFF  [STAND-OFF]  165.1,34.8 0 top
U$75  STAND-OFF  [STAND-OFF]  207.01,34.8 0 top
U$76  STAND-OFF  [STAND-OFF]  207.01,9.4 0 top
U$77  FIDUCIAL1X2  [FIDUCIAL-1X2]  163.83,11.94 0 top
U$78  FIDUCIAL1X2  [FIDUCIAL-1X2]  201.93,36.07 0 top
U$79  LOGO-SFENEW  [SFE-NEW-WEBLOGO]  196.6,19.81 0 bottom
U$80  LOGO-SFESK  [SFE-LOGO-FLAME]  194.31,30.99 0 top
U$81  STAND-OFF  [STAND-OFF]  165.1,40.39 0 top
U$82  STAND-OFF  [STAND-OFF]  165.1,65.79 0 top
U$83  STAND-OFF  [STAND-OFF]  207.01,65.79 0 top
U$84  STAND-OFF  [STAND-OFF]  207.01,40.39 0 top
U$85  FIDUCIAL1X2  [FIDUCIAL-1X2]  163.83,42.93 0 top
U$86  FIDUCIAL1X2  [FIDUCIAL-1X2]  201.93,67.06 0 top
U$87  LOGO-SFENEW  [SFE-NEW-WEBLOGO]  196.6,50.8 0 bottom
U$88  LOGO-SFESK  [SFE-LOGO-FLAME]  194.31,61.98 0 top
U$89  STAND-OFF  [STAND-OFF]  165.1,71.37 0 top
U$90  STAND-OFF  [STAND-OFF]  165.1,96.77 0 top
U$91  STAND-OFF  [STAND-OFF]  207.01,96.77 0 top
U$92  STAND-OFF  [STAND-OFF]  207.01,71.37 0 top
U$93  FIDUCIAL1X2  [FIDUCIAL-1X2]  163.83,73.91 0 top
U$94  FIDUCIAL1X2  [FIDUCIAL-1X2]  201.93,98.04 0 top
U$95  LOGO-SFENEW  [SFE-NEW-WEBLOGO]  196.6,81.79 0 bottom
U$96  LOGO-SFESK  [SFE-LOGO-FLAME]  194.31,92.96 0 top
U$97  STAND-OFF  [STAND-OFF]  215.9,9.4 0 top
U$98  STAND-OFF  [STAND-OFF]  215.9,34.8 0 top
U$99  STAND-OFF  [STAND-OFF]  257.81,34.8 0 top
U$100  STAND-OFF  [STAND-OFF]  257.81,9.4 0 top
U$101  FIDUCIAL1X2  [FIDUCIAL-1X2]  214.63,11.94 0 top
U$102  FIDUCIAL1X2  [FIDUCIAL-1X2]  252.73,36.07 0 top
U$103  LOGO-SFENEW  [SFE-NEW-WEBLOGO]  247.4,19.81 0 bottom
U$104  LOGO-SFESK  [SFE-LOGO-FLAME]  245.11,30.99 0 top
U$105  STAND-OFF  [STAND-OFF]  215.9,40.39 0 top
U$106  STAND-OFF  [STAND-OFF]  215.9,65.79 0 top
U$107  STAND-OFF  [STAND-OFF]  257.81,65.79 0 top
U$108  STAND-OFF  [STAND-OFF]  257.81,40.39 0 top
U$109  FIDUCIAL1X2  [FIDUCIAL-1X2]  214.63,42.93 0 top
U$110  FIDUCIAL1X2  [FIDUCIAL-1X2]  252.73,67.06 0 top
U$111  LOGO-SFENEW  [SFE-NEW-WEBLOGO]  247.4,50.8 0 bottom
U$112  LOGO-SFESK  [SFE-LOGO-FLAME]  245.11,61.98 0 top
U$113  STAND-OFF  [STAND-OFF]  215.9,71.37 0 top
U$114  STAND-OFF  [STAND-OFF]  215.9,96.77 0 top
U$115  STAND-OFF  [STAND-OFF]  257.81,96.77 0 top
U$116  STAND-OFF  [STAND-OFF]  257.81,71.37 0 top
U$117  FIDUCIAL1X2  [FIDUCIAL-1X2]  214.63,73.91 0 top
U$118  FIDUCIAL1X2  [FIDUCIAL-1X2]  252.73,98.04 0 top
U$119  LOGO-SFENEW  [SFE-NEW-WEBLOGO]  247.4,81.79 0 bottom
U$120  LOGO-SFESK  [SFE-LOGO-FLAME]  245.11,92.96 0 top
X1  USBSMD  [USB-MINIB]  66.04,22.1 0 top
X2  USBSMD  [USB-MINIB]  15.24,22.1 0 top
X3  USBSMD  [USB-MINIB]  15.24,53.09 0 top
X4  USBSMD  [USB-MINIB]  66.04,53.09 0 top
X5  USBSMD  [USB-MINIB]  15.24,84.07 0 top
X6  USBSMD  [USB-MINIB]  66.04,84.07 0 top
X7  USBSMD  [USB-MINIB]  116.84,22.1 0 top
X8  USBSMD  [USB-MINIB]  116.84,53.09 0 top
X9  USBSMD  [USB-MINIB]  116.84,84.07 0 top
X10  USBSMD  [USB-MINIB]  167.64,22.1 0 top
X11  USBSMD  [USB-MINIB]  167.64,53.09 0 top
X12  USBSMD  [USB-MINIB]  167.64,84.07 0 top
X13  USBSMD  [USB-MINIB]  218.44,22.1 0 top
X14  USBSMD  [USB-MINIB]  218.44,53.09 0 top
X15  USBSMD  [USB-MINIB]  218.44,84.07 0 top

## Library data of the parts
C1-C60 D1-D45 JP1-JP45 LED1-LED30 Q1-Q15 R1-R150 S1-S15 U2 U4 U6 U8 U10 U12 U14 U16 U18 U20 U22 U24 U26 U28 U30 U$1-U$120 X1-X15 = SparkFun
E$1 = SparkFun-Retired
E$2 E$7 LOGO1-LOGO15 = SparkFun-Aesthetics
F1-F15 = SparkFun-PowerIC
U1 U3 U5 U7 U9 U11 U13 U15 U17 U19 U21 U23 U25 U27 U29 = avr

## Nets
CTL: R10.1 U1.8 U2.1 U2.4 U2.10 U2.13
CTL1: R20.1 U3.8 U4.1 U4.4 U4.10 U4.13
CTL2: R30.1 U5.8 U6.1 U6.4 U6.10 U6.13
CTL3: R40.1 U7.8 U8.1 U8.4 U8.10 U8.13
CTL4: R50.1 U9.8 U10.1 U10.4 U10.10 U10.13
CTL5: R60.1 U11.8 U12.1 U12.4 U12.10 U12.13
CTL6: R70.1 U13.8 U14.1 U14.4 U14.10 U14.13
CTL7: R80.1 U15.8 U16.1 U16.4 U16.10 U16.13
CTL8: R90.1 U17.8 U18.1 U18.4 U18.10 U18.13
CTL9: R100.1 U19.8 U20.1 U20.4 U20.10 U20.13
CTL10: R110.1 U21.8 U22.1 U22.4 U22.10 U22.13
CTL11: R120.1 U23.8 U24.1 U24.4 U24.10 U24.13
CTL12: R130.1 U25.8 U26.1 U26.4 U26.10 U26.13
CTL13: R140.1 U27.8 U28.1 U28.4 U28.10 U28.13
CTL14: R150.1 U29.8 U30.1 U30.4 U30.10 U30.13
D+: LED1.A R1.1 X2.D+
D+1: LED3.A R11.1 X1.D+
D+2: LED5.A R21.1 X3.D+
D+3: LED7.A R31.1 X4.D+
D+4: LED9.A R41.1 X5.D+
D+5: LED11.A R51.1 X6.D+
D+6: LED13.A R61.1 X7.D+
D+7: LED15.A R71.1 X8.D+
D+8: LED17.A R81.1 X9.D+
D+9: LED19.A R91.1 X10.D+
D+10: LED21.A R101.1 X11.D+
D+11: LED23.A R111.1 X12.D+
D+12: LED25.A R121.1 X13.D+
D+13: LED27.A R131.1 X14.D+
D+14: LED29.A R141.1 X15.D+
D-: LED2.A R2.1 R3.1 X2.D-
D-1: LED4.A R12.1 R13.1 X1.D-
D-2: LED6.A R22.1 R23.1 X3.D-
D-3: LED8.A R32.1 R33.1 X4.D-
D-4: LED10.A R42.1 R43.1 X5.D-
D-5: LED12.A R52.1 R53.1 X6.D-
D-6: LED14.A R62.1 R63.1 X7.D-
D-7: LED16.A R72.1 R73.1 X8.D-
D-8: LED18.A R82.1 R83.1 X9.D-
D-9: LED20.A R92.1 R93.1 X10.D-
D-10: LED22.A R102.1 R103.1 X11.D-
D-11: LED24.A R112.1 R113.1 X12.D-
D-12: LED26.A R122.1 R123.1 X13.D-
D-13: LED28.A R132.1 R133.1 X14.D-
D-14: LED30.A R142.1 R143.1 X15.D-
GND: C1.C C2.2 C3.2 C4.2 JP2.6 JP3.4 JP3.6 JP3.8 JP3.10 LED1.C LED2.C R4.1 R5.1 R9.1 U1.10 U2.7 X2.GND
GND1: C5.2 C6.C C7.2 C8.2 JP5.4 JP5.6 JP5.8 JP5.10 JP6.6 LED3.C LED4.C R14.1 R15.1 R19.1 U3.10 U4.7 X1.GND
GND2: C9.2 C10.C C11.2 C12.2 JP8.4 JP8.6 JP8.8 JP8.10 JP9.6 LED5.C LED6.C R24.1 R25.1 R29.1 U5.10 U6.7 X3.GND
GND3: C13.2 C14.C C15.2 C16.2 JP11.4 JP11.6 JP11.8 JP11.10 JP12.6 LED7.C LED8.C R34.1 R35.1 R39.1 U7.10 U8.7 X4.GND
GND4: C17.2 C18.C C19.2 C20.2 JP14.4 JP14.6 JP14.8 JP14.10 JP15.6 LED9.C LED10.C R44.1 R45.1 R49.1 U9.10 U10.7 X5.GND
GND5: C21.2 C22.C C23.2 C24.2 JP17.4 JP17.6 JP17.8 JP17.10 JP18.6 LED11.C LED12.C R54.1 R55.1 R59.1 U11.10 U12.7 X6.GND
GND6: C25.2 C26.C C27.2 C28.2 JP20.4 JP20.6 JP20.8 JP20.10 JP21.6 LED13.C LED14.C R64.1 R65.1 R69.1 U13.10 U14.7 X7.GND
GND7: C29.2 C30.C C31.2 C32.2 JP23.4 JP23.6 JP23.8 JP23.10 JP24.6 LED15.C LED16.C R74.1 R75.1 R79.1 U15.10 U16.7 X8.GND
GND8: C33.2 C34.C C35.2 C36.2 JP26.4 JP26.6 JP26.8 JP26.10 JP27.6 LED17.C LED18.C R84.1 R85.1 R89.1 U17.10 U18.7 X9.GND
GND9: C37.2 C38.C C39.2 C40.2 JP29.4 JP29.6 JP29.8 JP29.10 JP30.6 LED19.C LED20.C R94.1 R95.1 R99.1 U19.10 U20.7 X10.GND
GND10: C41.2 C42.C C43.2 C44.2 JP32.4 JP32.6 JP32.8 JP32.10 JP33.6 LED21.C LED22.C R104.1 R105.1 R109.1 U21.10 U22.7 X11.GND
GND11: C45.2 C46.C C47.2 C48.2 JP35.4 JP35.6 JP35.8 JP35.10 JP36.6 LED23.C LED24.C R114.1 R115.1 R119.1 U23.10 U24.7 X12.GND
GND12: C49.2 C50.C C51.2 C52.2 JP38.4 JP38.6 JP38.8 JP38.10 JP39.6 LED25.C LED26.C R124.1 R125.1 R129.1 U25.10 U26.7 X13.GND
GND13: C53.2 C54.C C55.2 C56.2 JP41.4 JP41.6 JP41.8 JP41.10 JP42.6 LED27.C LED28.C R134.1 R135.1 R139.1 U27.10 U28.7 X14.GND
GND14: C57.2 C58.C C59.2 C60.2 JP44.4 JP44.6 JP44.8 JP44.10 JP45.6 LED29.C LED30.C R144.1 R145.1 R149.1 U29.10 U30.7 X15.GND
MISO': JP2.1 U1.18 U2.8
MISO'1: JP6.1 U3.18 U4.8
MISO'2: JP9.1 U5.18 U6.8
MISO'3: JP12.1 U7.18 U8.8
MISO'4: JP15.1 U9.18 U10.8
MISO'5: JP18.1 U11.18 U12.8
MISO'6: JP21.1 U13.18 U14.8
MISO'7: JP24.1 U15.18 U16.8
MISO'8: JP27.1 U17.18 U18.8
MISO'9: JP30.1 U19.18 U20.8
MISO'10: JP33.1 U21.18 U22.8
MISO'11: JP36.1 U23.18 U24.8
MISO'12: JP39.1 U25.18 U26.8
MISO'13: JP42.1 U27.18 U28.8
MISO'14: JP45.1 U29.18 U30.8
MOSI': JP2.4 U1.17 U2.5
MOSI'1: JP6.4 U3.17 U4.5
MOSI'2: JP9.4 U5.17 U6.5
MOSI'3: JP12.4 U7.17 U8.5
MOSI'4: JP15.4 U9.17 U10.5
MOSI'5: JP18.4 U11.17 U12.5
MOSI'6: JP21.4 U13.17 U14.5
MOSI'7: JP24.4 U15.17 U16.5
MOSI'8: JP27.4 U17.17 U18.5
MOSI'9: JP30.4 U19.17 U20.5
MOSI'10: JP33.4 U21.17 U22.5
MOSI'11: JP36.4 U23.17 U24.5
MOSI'12: JP39.4 U25.17 U26.5
MOSI'13: JP42.4 U27.17 U28.5
MOSI'14: JP45.4 U29.17 U30.5
N$1: R3.2 U1.11
N$2: D2.A U1.9
N$3: D3.C R9.2
N$4: F1.1 X2.VBUS
N$5: C3.1 Q1.3 U1.4
N$6: C4.1 Q1.1 U1.5
N$7: R13.2 U3.11
N$8: D4.A U3.9
N$9: D5.A U3.12
N$10: D5.C R14.2
N$11: D4.C R15.2
N$12: R17.1 U4.6
N$13: R18.1 U4.11
N$14: D6.C R19.2
N$15: F2.1 X1.VBUS
N$16: C7.1 Q2.3 U3.4
N$17: D1.A U1.12
N$18: D1.C R4.2
N$19: D2.C R5.2
N$20: C8.1 Q2.1 U3.5
N$21: R23.2 U5.11
N$22: R7.1 U2.6
N$23: D7.A U5.9
N$24: D8.A U5.12
N$25: R8.1 U2.11
N$26: D8.C R24.2
N$27: D7.C R25.2
N$28: R27.1 U6.6
N$29: R28.1 U6.11
N$30: D9.C R29.2
N$31: F3.1 X3.VBUS
N$32: C11.1 Q3.3 U5.4
N$33: C12.1 Q3.1 U5.5
N$34: R33.2 U7.11
N$35: D10.A U7.9
N$36: D11.A U7.12
N$37: D11.C R34.2
N$38: D10.C R35.2
N$39: R37.1 U8.6
N$40: R38.1 U8.11
N$41: D12.C R39.2
N$42: F4.1 X4.VBUS
N$43: C15.1 Q4.3 U7.4
N$44: C16.1 Q4.1 U7.5
N$45: R43.2 U9.11
N$46: D13.A U9.9
N$47: D14.A U9.12
N$48: D14.C R44.2
N$49: D13.C R45.2
N$50: R47.1 U10.6
N$51: R48.1 U10.11
N$52: D15.C R49.2
N$53: F5.1 X5.VBUS
N$54: C19.1 Q5.3 U9.4
N$55: C20.1 Q5.1 U9.5
N$56: R53.2 U11.11
N$57: D16.A U11.9
N$58: D17.A U11.12
N$59: D17.C R54.2
N$60: D16.C R55.2
N$61: R57.1 U12.6
N$62: R58.1 U12.11
N$63: D18.C R59.2
N$64: F6.1 X6.VBUS
N$65: C23.1 Q6.3 U11.4
N$66: C24.1 Q6.1 U11.5
N$67: R63.2 U13.11
N$68: D19.A U13.9
N$69: D20.A U13.12
N$70: D20.C R64.2
N$71: D19.C R65.2
N$72: R67.1 U14.6
N$73: R68.1 U14.11
N$74: D21.C R69.2
N$75: F7.1 X7.VBUS
N$76: C27.1 Q7.3 U13.4
N$77: C28.1 Q7.1 U13.5
N$78: R73.2 U15.11
N$79: D22.A U15.9
N$80: D23.A U15.12
N$81: D23.C R74.2
N$82: D22.C R75.2
N$83: R77.1 U16.6
N$84: R78.1 U16.11
N$85: D24.C R79.2
N$86: F8.1 X8.VBUS
N$87: C31.1 Q8.3 U15.4
N$88: C32.1 Q8.1 U15.5
N$89: R83.2 U17.11
N$90: D25.A U17.9
N$91: D26.A U17.12
N$92: D26.C R84.2
N$93: D25.C R85.2
N$94: R87.1 U18.6
N$95: R88.1 U18.11
N$96: D27.C R89.2
N$97: F9.1 X9.VBUS
N$98: C35.1 Q9.3 U17.4
N$99: C36.1 Q9.1 U17.5
N$100: R93.2 U19.11
N$101: D28.A U19.9
N$102: D29.A U19.12
N$103: D29.C R94.2
N$104: D28.C R95.2
N$105: R97.1 U20.6
N$106: R98.1 U20.11
N$107: D30.C R99.2
N$108: F10.1 X10.VBUS
N$109: C39.1 Q10.3 U19.4
N$110: C40.1 Q10.1 U19.5
N$111: R103.2 U21.11
N$112: D31.A U21.9
N$113: D32.A U21.12
N$114: D32.C R104.2
N$115: D31.C R105.2
N$116: R107.1 U22.6
N$117: R108.1 U22.11
N$118: D33.C R109.2
N$119: F11.1 X11.VBUS
N$120: C43.1 Q11.3 U21.4
N$121: C44.1 Q11.1 U21.5
N$122: R113.2 U23.11
N$123: D34.A U23.9
N$124: D35.A U23.12
N$125: D35.C R114.2
N$126: D34.C R115.2
N$127: R117.1 U24.6
N$128: R118.1 U24.11
N$129: D36.C R119.2
N$130: F12.1 X12.VBUS
N$131: C47.1 Q12.3 U23.4
N$132: C48.1 Q12.1 U23.5
N$133: R123.2 U25.11
N$134: D37.A U25.9
N$135: D38.A U25.12
N$136: D38.C R124.2
N$137: D37.C R125.2
N$138: R127.1 U26.6
N$139: R128.1 U26.11
N$140: D39.C R129.2
N$141: F13.1 X13.VBUS
N$142: C51.1 Q13.3 U25.4
N$143: C52.1 Q13.1 U25.5
N$144: R133.2 U27.11
N$145: D40.A U27.9
N$146: D41.A U27.12
N$147: D41.C R134.2
N$148: D40.C R135.2
N$149: R137.1 U28.6
N$150: R138.1 U28.11
N$151: D42.C R139.2
N$152: F14.1 X14.VBUS
N$153: C55.1 Q14.3 U27.4
N$154: C56.1 Q14.1 U27.5
N$155: R143.2 U29.11
N$156: D43.A U29.9
N$157: D44.A U29.12
N$158: D44.C R144.2
N$159: D43.C R145.2
N$160: R147.1 U30.6
N$161: R148.1 U30.11
N$162: D45.C R149.2
N$163: F15.1 X15.VBUS
N$164: C59.1 Q15.3 U29.4
N$165: C60.1 Q15.1 U29.5
PD+: R1.2 U1.6
PD+1: R11.2 U3.6
PD+2: R21.2 U5.6
PD+3: R31.2 U7.6
PD+4: R41.2 U9.6
PD+5: R51.2 U11.6
PD+6: R61.2 U13.6
PD+7: R71.2 U15.6
PD+8: R81.2 U17.6
PD+9: R91.2 U19.6
PD+10: R101.2 U21.6
PD+11: R111.2 U23.6
PD+12: R121.2 U25.6
PD+13: R131.2 U27.6
PD+14: R141.2 U29.6
PD-: R2.2 U1.7
PD-1: R12.2 U3.7
PD-2: R22.2 U5.7
PD-3: R32.2 U7.7
PD-4: R42.2 U9.7
PD-5: R52.2 U11.7
PD-6: R62.2 U13.7
PD-7: R72.2 U15.7
PD-8: R82.2 U17.7
PD-9: R92.2 U19.7
PD-10: R102.2 U21.7
PD-11: R112.2 U23.7
PD-12: R122.2 U25.7
PD-13: R132.2 U27.7
PD-14: R142.2 U29.7
RST: JP2.5 R6.1 U1.1
RST1: JP6.5 R16.1 U3.1
RST2: JP9.5 R26.1 U5.1
RST3: JP12.5 R36.1 U7.1
RST4: JP15.5 R46.1 U9.1
RST5: JP18.5 R56.1 U11.1
RST6: JP21.5 R66.1 U13.1
RST7: JP24.5 R76.1 U15.1
RST8: JP27.5 R86.1 U17.1
RST9: JP30.5 R96.1 U19.1
RST10: JP33.5 R106.1 U21.1
RST11: JP36.5 R116.1 U23.1
RST12: JP39.5 R126.1 U25.1
RST13: JP42.5 R136.1 U27.1
RST14: JP45.5 R146.1 U29.1
RST': U1.16 U2.2
RST'1: U3.16 U4.2
RST'2: U5.16 U6.2
RST'3: U7.16 U8.2
RST'4: U9.16 U10.2
RST'5: U11.16 U12.2
RST'6: U13.16 U14.2
RST'7: U15.16 U16.2
RST'8: U17.16 U18.2
RST'9: U19.16 U20.2
RST'10: U21.16 U22.2
RST'11: U23.16 U24.2
RST'12: U25.16 U26.2
RST'13: U27.16 U28.2
RST'14: U29.16 U30.2
SCK': JP2.3 U1.19 U2.12
SCK'1: JP6.3 U3.19 U4.12
SCK'2: JP9.3 U5.19 U6.12
SCK'3: JP12.3 U7.19 U8.12
SCK'4: JP15.3 U9.19 U10.12
SCK'5: JP18.3 U11.19 U12.12
SCK'6: JP21.3 U13.19 U14.12
SCK'7: JP24.3 U15.19 U16.12
SCK'8: JP27.3 U17.19 U18.12
SCK'9: JP30.3 U19.19 U20.12
SCK'10: JP33.3 U21.19 U22.12
SCK'11: JP36.3 U23.19 U24.12
SCK'12: JP39.3 U25.19 U26.12
SCK'13: JP42.3 U27.19 U28.12
SCK'14: JP45.3 U29.19 U30.12
TARGET-MISO: JP3.9 U2.9
TARGET-MISO1: JP5.9 U4.9
TARGET-MISO2: JP8.9 U6.9
TARGET-MISO3: JP11.9 U8.9
TARGET-MISO4: JP14.9 U10.9
TARGET-MISO5: JP17.9 U12.9
TARGET-MISO6: JP20.9 U14.9
TARGET-MISO7: JP23.9 U16.9
TARGET-MISO8: JP26.9 U18.9
TARGET-MISO9: JP29.9 U20.9
TARGET-MISO10: JP32.9 U22.9
TARGET-MISO11: JP35.9 U24.9
TARGET-MISO12: JP38.9 U26.9
TARGET-MISO13: JP41.9 U28.9
TARGET-MISO14: JP44.9 U30.9
TARGET-MOSI: JP3.1 R7.2
TARGET-MOSI1: JP5.1 R17.2
TARGET-MOSI2: JP8.1 R27.2
TARGET-MOSI3: JP11.1 R37.2
TARGET-MOSI4: JP14.1 R47.2
TARGET-MOSI5: JP17.1 R57.2
TARGET-MOSI6: JP20.1 R67.2
TARGET-MOSI7: JP23.1 R77.2
TARGET-MOSI8: JP26.1 R87.2
TARGET-MOSI9: JP29.1 R97.2
TARGET-MOSI10: JP32.1 R107.2
TARGET-MOSI11: JP35.1 R117.2
TARGET-MOSI12: JP38.1 R127.2
TARGET-MOSI13: JP41.1 R137.2
TARGET-MOSI14: JP44.1 R147.2
TARGET-PWR: JP3.2 R10.2 S1.2 U2.14
TARGET-PWR1: JP5.2 R20.2 S2.2 U4.14
TARGET-PWR2: JP8.2 R30.2 S3.2 U6.14
TARGET-PWR3: JP11.2 R40.2 S4.2 U8.14
TARGET-PWR4: JP14.2 R50.2 S5.2 U10.14
TARGET-PWR5: JP17.2 R60.2 S6.2 U12.14
TARGET-PWR6: JP20.2 R70.2 S7.2 U14.14
TARGET-PWR7: JP23.2 R80.2 S8.2 U16.14
TARGET-PWR8: JP26.2 R90.2 S9.2 U18.14
TARGET-PWR9: JP29.2 R100.2 S10.2 U20.14
TARGET-PWR10: JP32.2 R110.2 S11.2 U22.14
TARGET-PWR11: JP35.2 R120.2 S12.2 U24.14
TARGET-PWR12: JP38.2 R130.2 S13.2 U26.14
TARGET-PWR13: JP41.2 R140.2 S14.2 U28.14
TARGET-PWR14: JP44.2 R150.2 S15.2 U30.14
TARGET-RST: JP3.5 U2.3
TARGET-RST1: JP5.5 U4.3
TARGET-RST2: JP8.5 U6.3
TARGET-RST3: JP11.5 U8.3
TARGET-RST4: JP14.5 U10.3
TARGET-RST5: JP17.5 U12.3
TARGET-RST6: JP20.5 U14.3
TARGET-RST7: JP23.5 U16.3
TARGET-RST8: JP26.5 U18.3
TARGET-RST9: JP29.5 U20.3
TARGET-RST10: JP32.5 U22.3
TARGET-RST11: JP35.5 U24.3
TARGET-RST12: JP38.5 U26.3
TARGET-RST13: JP41.5 U28.3
TARGET-RST14: JP44.5 U30.3
TARGET-SCK: JP3.7 R8.2
TARGET-SCK1: JP5.7 R18.2
TARGET-SCK2: JP8.7 R28.2
TARGET-SCK3: JP11.7 R38.2
TARGET-SCK4: JP14.7 R48.2
TARGET-SCK5: JP17.7 R58.2
TARGET-SCK6: JP20.7 R68.2
TARGET-SCK7: JP23.7 R78.2
TARGET-SCK8: JP26.7 R88.2
TARGET-SCK9: JP29.7 R98.2
TARGET-SCK10: JP32.7 R108.2
TARGET-SCK11: JP35.7 R118.2
TARGET-SCK12: JP38.7 R128.2
TARGET-SCK13: JP41.7 R138.2
TARGET-SCK14: JP44.7 R148.2
VCC: C1.A C2.1 D3.A F1.2 JP1.1 JP1.2 JP2.2 R6.2 S1.1 U1.20
VCC1: C5.1 C6.A D6.A F2.2 JP4.1 JP4.2 JP6.2 R16.2 S2.1 U3.20
VCC2: C9.1 C10.A D9.A F3.2 JP7.1 JP7.2 JP9.2 R26.2 S3.1 U5.20
VCC3: C13.1 C14.A D12.A F4.2 JP10.1 JP10.2 JP12.2 R36.2 S4.1 U7.20
VCC4: C17.1 C18.A D15.A F5.2 JP13.1 JP13.2 JP15.2 R46.2 S5.1 U9.20
VCC5: C21.1 C22.A D18.A F6.2 JP16.1 JP16.2 JP18.2 R56.2 S6.1 U11.20
VCC6: C25.1 C26.A D21.A F7.2 JP19.1 JP19.2 JP21.2 R66.2 S7.1 U13.20
VCC7: C29.1 C30.A D24.A F8.2 JP22.1 JP22.2 JP24.2 R76.2 S8.1 U15.20
VCC8: C33.1 C34.A D27.A F9.2 JP25.1 JP25.2 JP27.2 R86.2 S9.1 U17.20
VCC9: C37.1 C38.A D30.A F10.2 JP28.1 JP28.2 JP30.2 R96.2 S10.1 U19.20
VCC10: C41.1 C42.A D33.A F11.2 JP31.1 JP31.2 JP33.2 R106.2 S11.1 U21.20
VCC11: C45.1 C46.A D36.A F12.2 JP34.1 JP34.2 JP36.2 R116.2 S12.1 U23.20
VCC12: C49.1 C50.A D39.A F13.2 JP37.1 JP37.2 JP39.2 R126.2 S13.1 U25.20
VCC13: C53.1 C54.A D42.A F14.2 JP40.1 JP40.2 JP42.2 R136.2 S14.1 U27.20
VCC14: C57.1 C58.A D45.A F15.2 JP43.1 JP43.2 JP45.2 R146.2 S15.1 U29.20

## Tracks (layer width: path | path; a pad name or v marks a point on that pad's centre or on a via)
CTL  (via drill 0.51)
  Top 0.203: 41.27,18.92 U2.1 | v40.64,19.56 40.01,20.19 U2.13 36.58,20.19 36.07,20.7 36.07,23.5 36.58,24 U2.10 | v40.64,19.56 41.27,18.92 | U2.4 41.27,22.73 40.64,22.1 v40.64,19.56 | U1.8 v33.02,19.56 | R10.1 40.64,17.02 41.27,17.65 41.27,18.92
  Bottom 0.203: v33.02,19.56 v40.64,19.56
CTL1  (via drill 0.51)
  Top 0.203: 92.08,18.92 U4.1 | v91.44,19.56 90.81,20.19 U4.13 87.38,20.19 86.87,20.7 86.87,23.5 87.38,24 U4.10 | v91.44,19.56 92.08,18.92 | U4.4 92.08,22.73 91.44,22.1 v91.44,19.56 | U3.8 v83.82,19.56 | R20.1 91.44,17.02 92.08,17.65 92.08,18.92
  Bottom 0.203: v83.82,19.56 v91.44,19.56
CTL2  (via drill 0.51)
  Top 0.203: 41.27,49.91 U6.1 | v40.64,50.55 40.01,51.18 U6.13 36.58,51.18 36.07,51.69 36.07,54.48 36.58,54.99 U6.10 | v40.64,50.55 41.27,49.91 | U6.4 41.27,53.72 40.64,53.09 v40.64,50.55 | U5.8 v33.02,50.55 | R30.1 40.64,48.01 41.27,48.64 41.27,49.91
  Bottom 0.203: v33.02,50.55 v40.64,50.55
CTL3  (via drill 0.51)
  Top 0.203: 92.08,49.91 U8.1 | v91.44,50.55 90.81,51.18 U8.13 87.38,51.18 86.87,51.69 86.87,54.48 87.38,54.99 U8.10 | v91.44,50.55 92.08,49.91 | U8.4 92.08,53.72 91.44,53.09 v91.44,50.55 | U7.8 v83.82,50.55 | R40.1 91.44,48.01 92.08,48.64 92.08,49.91
  Bottom 0.203: v83.82,50.55 v91.44,50.55
CTL4  (via drill 0.51)
  Top 0.203: 41.27,80.9 U10.1 | v40.64,81.53 40.01,82.17 U10.13 36.58,82.17 36.07,82.68 36.07,85.47 36.58,85.98 U10.10 | v40.64,81.53 41.27,80.9 | U10.4 41.27,84.71 40.64,84.07 v40.64,81.53 | U9.8 v33.02,81.53 | R50.1 40.64,78.99 41.27,79.63 41.27,80.9
  Bottom 0.203: v33.02,81.53 v40.64,81.53
CTL5  (via drill 0.51)
  Top 0.203: 92.08,80.9 U12.1 | v91.44,81.53 90.81,82.17 U12.13 87.38,82.17 86.87,82.68 86.87,85.47 87.38,85.98 U12.10 | v91.44,81.53 92.08,80.9 | U12.4 92.08,84.71 91.44,84.07 v91.44,81.53 | U11.8 v83.82,81.53 | R60.1 91.44,78.99 92.08,79.63 92.08,80.9
  Bottom 0.203: v83.82,81.53 v91.44,81.53
CTL6  (via drill 0.51)
  Top 0.203: 142.88,18.92 U14.1 | v142.24,19.56 141.6,20.19 U14.13 138.18,20.19 137.67,20.7 137.67,23.5 138.18,24 U14.10 | v142.24,19.56 142.88,18.92 | U14.4 142.88,22.73 142.24,22.1 v142.24,19.56 | U13.8 v134.62,19.56 | R70.1 142.24,17.02 142.88,17.65 142.88,18.92
  Bottom 0.203: v134.62,19.56 v142.24,19.56
CTL7  (via drill 0.51)
  Top 0.203: 142.88,49.91 U16.1 | v142.24,50.55 141.6,51.18 U16.13 138.18,51.18 137.67,51.69 137.67,54.48 138.18,54.99 U16.10 | v142.24,50.55 142.88,49.91 | U16.4 142.88,53.72 142.24,53.09 v142.24,50.55 | U15.8 v134.62,50.55 | R80.1 142.24,48.01 142.88,48.64 142.88,49.91
  Bottom 0.203: v134.62,50.55 v142.24,50.55
CTL8  (via drill 0.51)
  Top 0.203: 142.88,80.9 U18.1 | v142.24,81.53 141.6,82.17 U18.13 138.18,82.17 137.67,82.68 137.67,85.47 138.18,85.98 U18.10 | v142.24,81.53 142.88,80.9 | U18.4 142.88,84.71 142.24,84.07 v142.24,81.53 | U17.8 v134.62,81.53 | R90.1 142.24,78.99 142.88,79.63 142.88,80.9
  Bottom 0.203: v134.62,81.53 v142.24,81.53
CTL9  (via drill 0.51)
  Top 0.203: 193.68,18.92 U20.1 | v193.04,19.56 192.41,20.19 U20.13 188.98,20.19 188.47,20.7 188.47,23.5 188.98,24 U20.10 | v193.04,19.56 193.68,18.92 | U20.4 193.68,22.73 193.04,22.1 v193.04,19.56 | U19.8 v185.42,19.56 | R100.1 193.04,17.02 193.68,17.65 193.68,18.92
  Bottom 0.203: v185.42,19.56 v193.04,19.56
CTL10  (via drill 0.51)
  Top 0.203: 193.68,49.91 U22.1 | v193.04,50.55 192.41,51.18 U22.13 188.98,51.18 188.47,51.69 188.47,54.48 188.98,54.99 U22.10 | v193.04,50.55 193.68,49.91 | U22.4 193.68,53.72 193.04,53.09 v193.04,50.55 | U21.8 v185.42,50.55 | R110.1 193.04,48.01 193.68,48.64 193.68,49.91
  Bottom 0.203: v185.42,50.55 v193.04,50.55
CTL11  (via drill 0.51)
  Top 0.203: 193.68,80.9 U24.1 | v193.04,81.53 192.41,82.17 U24.13 188.98,82.17 188.47,82.68 188.47,85.47 188.98,85.98 U24.10 | v193.04,81.53 193.68,80.9 | U24.4 193.68,84.71 193.04,84.07 v193.04,81.53 | U23.8 v185.42,81.53 | R120.1 193.04,78.99 193.68,79.63 193.68,80.9
  Bottom 0.203: v185.42,81.53 v193.04,81.53
CTL12  (via drill 0.51)
  Top 0.203: 244.47,18.92 U26.1 | v243.84,19.56 243.21,20.19 U26.13 239.78,20.19 239.27,20.7 239.27,23.5 239.78,24 U26.10 | v243.84,19.56 244.47,18.92 | U26.4 244.47,22.73 243.84,22.1 v243.84,19.56 | U25.8 v236.22,19.56 | R130.1 243.84,17.02 244.47,17.65 244.47,18.92
  Bottom 0.203: v236.22,19.56 v243.84,19.56
CTL13  (via drill 0.51)
  Top 0.203: 244.47,49.91 U28.1 | v243.84,50.55 243.21,51.18 U28.13 239.78,51.18 239.27,51.69 239.27,54.48 239.78,54.99 U28.10 | v243.84,50.55 244.47,49.91 | U28.4 244.47,53.72 243.84,53.09 v243.84,50.55 | U27.8 v236.22,50.55 | R140.1 243.84,48.01 244.47,48.64 244.47,49.91
  Bottom 0.203: v236.22,50.55 v243.84,50.55
CTL14  (via drill 0.51)
  Top 0.203: 244.47,80.9 U30.1 | v243.84,81.53 243.21,82.17 U30.13 239.78,82.17 239.27,82.68 239.27,85.47 239.78,85.98 U30.10 | v243.84,81.53 244.47,80.9 | U30.4 244.47,84.71 243.84,84.07 v243.84,81.53 | U29.8 v236.22,81.53 | R150.1 243.84,78.99 244.47,79.63 244.47,80.9
  Bottom 0.203: v236.22,81.53 v243.84,81.53
D+
  Top 0.203: LED1.A 12.33,15.76 12.7,16.13 13.59,16.13 13.97,16.51 13.97,20.07 16,22.1 X2.D+ 19.3,22.1 19.43,21.97 19.43,20.07 19.94,19.56 R1.1
D+1
  Top 0.203: LED3.A 63.13,15.76 63.5,16.13 64.39,16.13 64.77,16.51 64.77,20.07 66.8,22.1 X1.D+ 70.1,22.1 70.23,21.97 70.23,20.07 70.74,19.56 R11.1
D+2
  Top 0.203: LED5.A 12.33,46.75 12.7,47.12 13.59,47.12 13.97,47.5 13.97,51.05 16,53.09 X3.D+ 19.3,53.09 19.43,52.96 19.43,51.05 19.94,50.55 R21.1
D+3
  Top 0.203: LED7.A 63.13,46.75 63.5,47.12 64.39,47.12 64.77,47.5 64.77,51.05 66.8,53.09 X4.D+ 70.1,53.09 70.23,52.96 70.23,51.05 70.74,50.55 R31.1
D+4
  Top 0.203: LED9.A 12.33,77.74 12.7,78.11 13.59,78.11 13.97,78.49 13.97,82.04 16,84.07 X5.D+ 19.3,84.07 19.43,83.95 19.43,82.04 19.94,81.53 R41.1
D+5
  Top 0.203: LED11.A 63.13,77.74 63.5,78.11 64.39,78.11 64.77,78.49 64.77,82.04 66.8,84.07 X6.D+ 70.1,84.07 70.23,83.95 70.23,82.04 70.74,81.53 R51.1
D+6
  Top 0.203: LED13.A 113.93,15.76 114.3,16.13 115.19,16.13 115.57,16.51 115.57,20.07 117.6,22.1 X7.D+ 120.9,22.1 121.03,21.97 121.03,20.07 121.54,19.56 R61.1
D+7
  Top 0.203: LED15.A 113.93,46.75 114.3,47.12 115.19,47.12 115.57,47.5 115.57,51.05 117.6,53.09 X8.D+ 120.9,53.09 121.03,52.96 121.03,51.05 121.54,50.55 R71.1
D+8
  Top 0.203: LED17.A 113.93,77.74 114.3,78.11 115.19,78.11 115.57,78.49 115.57,82.04 117.6,84.07 X9.D+ 120.9,84.07 121.03,83.95 121.03,82.04 121.54,81.53 R81.1
D+9
  Top 0.203: LED19.A 164.73,15.76 165.1,16.13 165.99,16.13 166.37,16.51 166.37,20.07 168.4,22.1 X10.D+ 171.7,22.1 171.83,21.97 171.83,20.07 172.34,19.56 R91.1
D+10
  Top 0.203: LED21.A 164.73,46.75 165.1,47.12 165.99,47.12 166.37,47.5 166.37,51.05 168.4,53.09 X11.D+ 171.7,53.09 171.83,52.96 171.83,51.05 172.34,50.55 R101.1
D+11
  Top 0.203: LED23.A 164.73,77.74 165.1,78.11 165.99,78.11 166.37,78.49 166.37,82.04 168.4,84.07 X12.D+ 171.7,84.07 171.83,83.95 171.83,82.04 172.34,81.53 R111.1
D+12
  Top 0.203: LED25.A 215.53,15.76 215.9,16.13 216.79,16.13 217.17,16.51 217.17,20.07 219.2,22.1 X13.D+ 222.5,22.1 222.63,21.97 222.63,20.07 223.14,19.56 R121.1
D+13
  Top 0.203: LED27.A 215.53,46.75 215.9,47.12 216.79,47.12 217.17,47.5 217.17,51.05 219.2,53.09 X14.D+ 222.5,53.09 222.63,52.96 222.63,51.05 223.14,50.55 R131.1
D+14
  Top 0.203: LED29.A 215.53,77.74 215.9,78.11 216.79,78.11 217.17,78.49 217.17,82.04 219.2,84.07 X15.D+ 222.5,84.07 222.63,83.95 222.63,82.04 223.14,81.53 R141.1
D-  (via drill 0.51)
  Top 0.203: 21.08,18.43 R2.1 R3.1 20.74,16.17 20.32,15.75 16.51,15.75 v15.24,17.02 | v15.24,22.9 X2.D- | LED2.A v11.18,13.46
  Bottom 0.203: 15.24,22.86 v15.24,22.9 12.3,19.96 | 12.3,19.96 11.18,18.83 v11.18,13.46 | 12.3,19.96 v15.24,17.02
D-1  (via drill 0.51)
  Top 0.203: 71.88,18.43 R12.1 R13.1 71.54,16.17 71.12,15.75 67.31,15.75 v66.04,17.02 | v66.04,22.9 X1.D- | LED4.A v61.98,13.46
  Bottom 0.203: 66.04,22.86 v66.04,22.9 63.1,19.96 | 63.1,19.96 61.98,18.83 v61.98,13.46 | 63.1,19.96 v66.04,17.02
D-2  (via drill 0.51)
  Top 0.203: 21.08,49.42 R22.1 R23.1 20.74,47.16 20.32,46.74 16.51,46.74 v15.24,48.01 | v15.24,53.89 X3.D- | LED6.A v11.18,44.45
  Bottom 0.203: 15.24,53.85 v15.24,53.89 12.3,50.95 | 12.3,50.95 11.18,49.82 v11.18,44.45 | 12.3,50.95 v15.24,48.01
D-3  (via drill 0.51)
  Top 0.203: 71.88,49.42 R32.1 R33.1 71.54,47.16 71.12,46.74 67.31,46.74 v66.04,48.01 | v66.04,53.89 X4.D- | LED8.A v61.98,44.45
  Bottom 0.203: 66.04,53.85 v66.04,53.89 63.1,50.95 | 63.1,50.95 61.98,49.82 v61.98,44.45 | 63.1,50.95 v66.04,48.01
D-4  (via drill 0.51)
  Top 0.203: 21.08,80.41 R42.1 R43.1 20.74,78.14 20.32,77.72 16.51,77.72 v15.24,78.99 | v15.24,84.87 X5.D- | LED10.A v11.18,75.44
  Bottom 0.203: 15.24,84.84 v15.24,84.87 12.3,81.93 | 12.3,81.93 11.18,80.81 v11.18,75.44 | 12.3,81.93 v15.24,78.99
D-5  (via drill 0.51)